# Altium PCB PCB1.PcbDoc
Units mm, origin at the board's own origin, x right, y up, seen from the top; angles counter-clockwise.
Board outline 80 x 80 mm, 2 copper layers (Top Layer, Bottom Layer); 25 components, 8 nets, 53 pads, 24 vias.
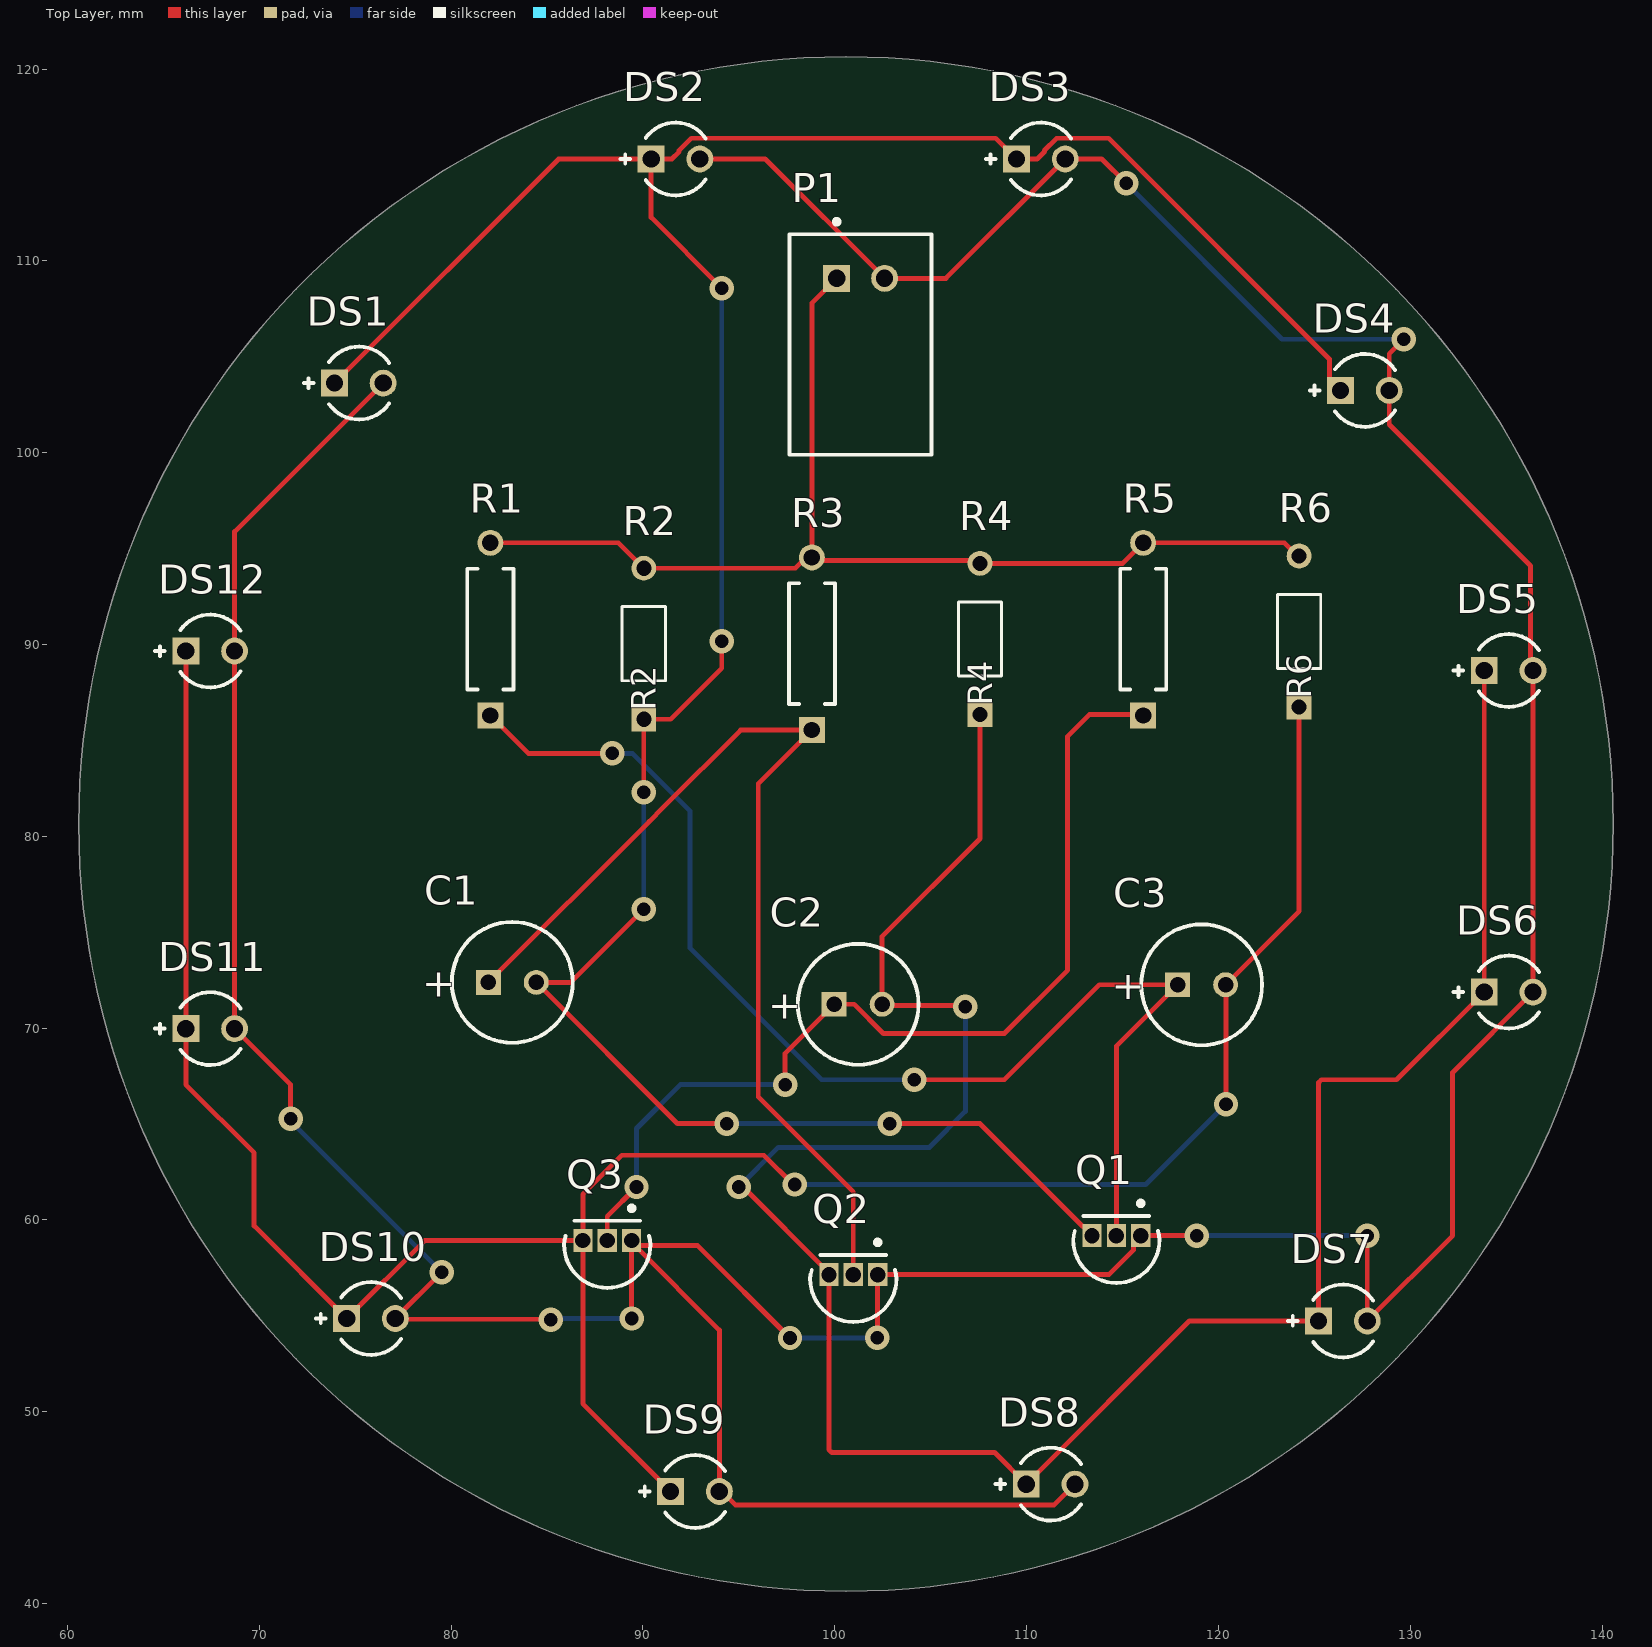
[diagram p0: Top Layer view]
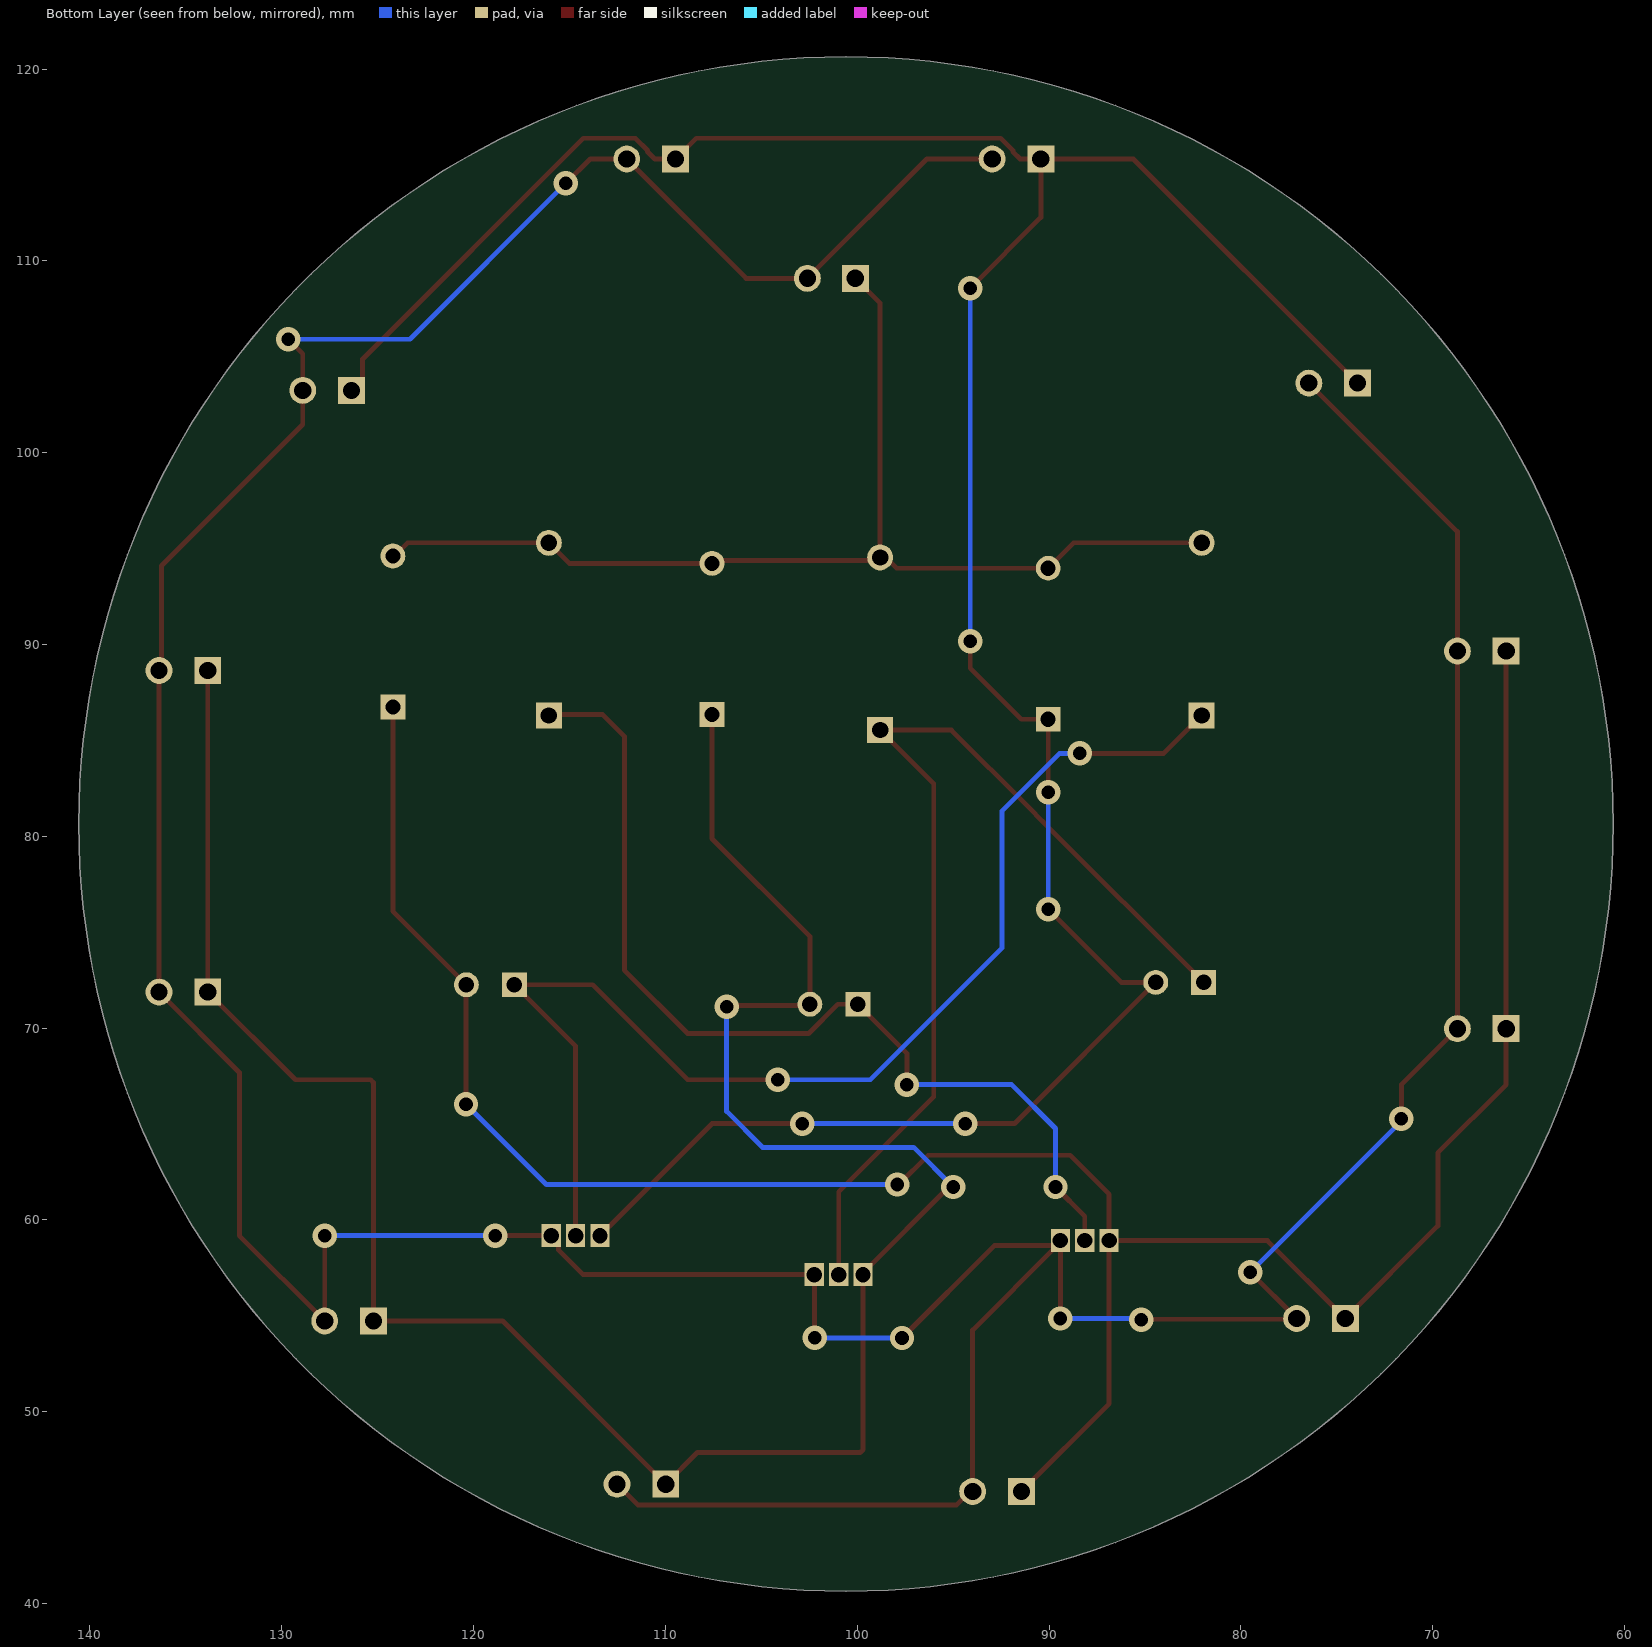
[diagram p1: Bottom Layer view, seen from below]

## Layer stack, top to bottom
Top Solder: solder mask 0.0102, Solder Resist, Dk 3.5
Top Layer: signal copper 0.0356
Dielectric 1: dielectric 0.32, FR-4, Dk 4.8
Bottom Layer: signal copper 0.0356
Bottom Solder: solder mask 0.0102, Solder Resist, Dk 3.5

## Board outline
60.584,80.645 ccw(c100.584,80.645) 100.584,40.645 ccw(c100.584,80.645) 140.584,80.645 ccw(c100.584,80.645) 100.584,120.645 ccw(c100.584,80.645)

## Design rules (kind name [scope] priority, off if disabled: settings)
Clearance [All] p1: gap=0.254 ignorepadtopadclearanceinfootprint=FALSE
PolygonConnect [All] p1: connectstyle=Relief reliefconductorwidth=0.254 reliefentries=4 polygonreliefangle="90 Angle" airgapwidth=0.254
RoutingVias [All] p1: holewidth=0.711 width=1.27 viastyle="Through Hole" minholewidth=0.711 minwidth=1.27 maxholewidth=0.711 maxwidth=1.27
SolderMaskExpansion [All] p1: expansion=0 istentingtop=FALSE
SupplyNets "Schematic Supply Nets" [InNet('GND')] p1: voltage=0.000
Width [All] p1: maxlimit=0.254 minlimit=0.254 preferedwidth=0.254
30 further rules are at their usual default settings.

## Components (designator, comment, footprint, x,y, rotation, side; value= is the part's Value field where it differs from the comment)
C1 "ECA-2AM220" CAPPR55-250-1120X630X1220 83.185,72.39 r0 top value=22µF
C2 "ECA-2AM220" CAPPR55-250-1120X630X1220 101.219,71.247 r0 top value=22µF
C3 "ECA-2AM220" CAPPR55-250-1120X630X1220 119.126,72.263 r0 top value=22µF
DS1 "LTL-1CHE" INDPR60-254-520X380X650 75.184,103.632 r0 top
DS2 "LTL-1CHE" INDPR60-254-520X380X650 91.694,115.316 r0 top
DS3 "LTL-1CHE" INDPR60-254-520X380X650 110.744,115.316 r0 top
DS4 "LTL-1CHE" INDPR60-254-520X380X650 127.635,103.251 r0 top
DS5 "LTL-1CHE" INDPR60-254-520X380X650 135.128,88.646 r0 top
DS6 "LTL-1CHE" INDPR60-254-520X380X650 135.128,71.882 r0 top
DS7 "LTL-1CHE" INDPR60-254-520X380X650 126.492,54.737 r0 top
DS8 "LTL-1CHE" INDPR60-254-520X380X650 111.252,46.228 r0 top
DS9 "LTL-1CHE" INDPR60-254-520X380X650 92.71,45.847 r0 top
DS10 "LTL-1CHE" INDPR60-254-520X380X650 75.819,54.864 r0 top
DS11 "LTL-1CHE" INDPR60-254-520X380X650 67.437,69.977 r0 top
DS12 "LTL-1CHE" INDPR60-254-520X380X650 67.437,89.662 r0 top
P1 "S2B-XH-A(LF)(SN)" JST-S2B-XH-A(LF)(SN)_V 101.346,109.093 r0 top
Q1 "S9013" JSCJ-TO-92-3_V 114.681,59.182 r180 top
Q2 "S9013" JSCJ-TO-92-3_V 100.965,57.15 r180 top
Q3 "S9013" JSCJ-TO-92-3_V 88.138,58.928 r180 top
R1 "MFR-25FBF52-10K" RESA60-630X240 82.042,90.805 r90 top value=10k
R2 "CF18JT330R" STA_CF18_STP 90.043,86.106 r90 top value=330
R3 "MFR-25FBF52-10K" RESA60-630X240 98.806,90.043 r90 top value=10k
R4 "CF18JT330R" STA_CF18_STP 107.569,86.36 r90 top value=330
R5 "MFR-25FBF52-10K" RESA60-630X240 116.078,90.805 r90 top value=10k
R6 "CF18JT330R" STA_CF18_STP 124.206,86.741 r90 top value=330

## Footprints (in the part's own frame and the unit in brackets; to place one, negate y for a bottom-side part, rotate by r counter-clockwise, add the part's x,y. Pads: shape width x height; smd on the part's side, far side on the other; paste and mask are expansions set on the pad)
CAPPR55-250-1120X630X1220 [mm] "THD, 2-Leads, Dia 6.3mm, Pin Spacing 2.5mm"
  rect 1.3x1.3 hole 0.8: 1(-1.25,0)
  round 1.3 hole 0.8: 2(1.25,0)
  silkscreen extent -3.15,-3.15 3.15,3.15, body extent -3.15,-3.15 3.16,3.15, height 12.21
INDPR60-254-520X380X650 [mm] "THD, 2-Leads, Dia 3.8mm, Pitch 2.54mm"
  rect 1.4x1.4 hole 0.9: 1(-1.27,0)
  round 1.4 hole 0.9: 2(1.27,0)
  silkscreen extent -2.87,-1.9 1.58,1.9, body extent -1.9,-1.9 1.9,1.9, height 6.5
JSCJ-TO-92-3_V [mm] "TO-92, 3-leads, Height 4.7mm, Pitch 1.27mm"
  rect 1x1.2 hole 0.8: 1(-1.27,0) 2(0,0) 3(1.27,0)
  silkscreen extent -2.25,-1.81 2.25,2.47, body extent -2.25,-1.03 2.25,2.47, height 4.7
JST-S2B-XH-A(LF)(SN)_V [mm] "Header, 2-Leads, Body 7.4x11.5mm, Pitch 2.5mm"
  rect 1.4x1.4 hole 0.9: 1(-1.25,0)
  round 1.4 hole 0.9: 2(1.25,0)
  silkscreen extent -3.7,-9.2 3.7,3.08, body extent -3.7,-9.2 3.7,2.3, height 5.95
RESA60-630X240 [mm] "Axial Resistor, 2-Leads, Dia 2.4mm, Body Length 6.3mm"
  rect 1.35x1.35 hole 0.85: 1(-4.5,0)
  round 1.35 hole 0.85: 2(4.5,0)
  silkscreen extent -3.15,-1.2 3.15,1.2, body extent -4.77,-1.19 4.77,1.2, height 2.4
STA_CF18_STP [mil]
  rect 51x51 hole 31 paste-99999 mask+0: 1(0,0)
  round 51 hole 31 paste-99999 mask+0: 2(310,0)
  silkscreen extent 79,-44 231,45, body extent -11,-39 321,39, height 79

## Part data
C1 C2 C3: library part CMP-001-00035-7, "Aluminum Electrolytic Capacitor, 22 uF, +/- 20%, 100 V, -40 to 85 degC, 2-Pin THD, RoHS, Bulk", Capacitor Type=Electrolytic, Case/Package=Radial, Manufacturer=Panasonic, Max Operating Temperature=85°C, Min Operating Temperature=-40°C, Package Description="2-Pin Radial Lead, Dia 6.3 mm, Height 12.2 mm", Package Quantity=200, Package Reference=CAPPR55-250-1120X630X1220, Ripple Current=115mA, Tolerance=20%, Voltage Rating=100V, Datasheet URL=https://industrial.panasonic.com/cdbs/www-data/pdf/RDF0000/ABA0000C1047.pdf, Datasheet Version=Mar-16, Diameter=6.3mm, Lead Pitch=2.5mm, Manufacturer URL=http://www.panasonic.com/, Mounting Technology=TH, Packaging=Bulk, Pins=2, Ripple Current (AC)=115mA, RoHS Compliant=True
DS1 DS2 DS3 DS4 DS5 DS6 DS7 DS8 DS9 DS10 DS11 DS12: library part CMP-007-00018-2, "LED Uni-Color Red, 100 mW, 30 mA, -55 to 100 degC, 2-Pin THD, RoHS, Bulk", Case/Package=Radial, Colour=Red, Forward Current=20mA, Forward Voltage=2V, Manufacturer=Lite-On, Max Operating Temperature=100°C, Min Operating Temperature=-55°C, Package Description="2-Pin Through Hole Device, Dia 3.8 mm, Pitch 2.54 mm", Package Quantity=1000, Datasheet URL=https://datasheet.ciiva.com/15117/getdatasheetpartid-187746-15117985.pdf, Datasheet Version=Dec-03, Illumination Colour=Red, Lens Style=Dome, Luminous Intensity=12.6mcd, Manufacturer URL=http://www.us.liteon.com/, Mounting Technology=TH, Nominal Vf=2V, Package Reference=LTL-1CHE, Packaging=Bulk, Pins=2, RoHS Compliant=True, Viewing Angle=60degrees
P1: library part CMP-002-00032-2, "Male Header, Pitch 2.5 mm, 1 x 2 Position, Height 6.1 mm, Tail Length 3.4 mm, -25 to 85 degC, RoHS, Bulk", Manufacturer=JST, Max Operating Temperature=85°C, Min Operating Temperature=-25°C, Package Description="XH Series Disconnectable Crimp Style Connector, Pitch 2.5 mm, 1 x 2 Position, Height 6.1 mm, Tail Length 3.4 mm", Case/Package=S2B-XH-A(LF)(SN), Connector Type=Header, Datasheet URL=http://www.jst-mfg.com/product/pdf/eng/eXH.pdf, Datasheet Version=May-16, Gender=Male, Manufacturer URL=http://www.jst.com/home2.html, Mounting Technology=TH, Package Reference=S2B-XH-A(LF)(SN), RoHS Compliant=Unknown
Q1 Q2 Q3: library part CMP-013-00000-3, "Transistor, NPN, 0.1 uA, 150 MHz, 3-Pin TO-92", Case/Package=TO-92-3, Manufacturer="Jiangsu Changjiang Electronics Technology", Package Description="3-Pin Through Hole Device, Height 4.7 mm, Pitch 2.3 mm", Datasheet URL=http://www.cj-elec.com/txUpfile/20121910315050632.pdf, Datasheet Version="Rev. B, 11/2011", Mounting Technology=TH, Package Reference=TO-92-3, RoHS Compliant=False
R1 R3 R5: library part CMP-009-00047-4, "Axial Resistor, 10 KOhm, +/- 1%, 0.25 W, -55 to 155 degC, 2-Pin THD, RoHS, Bulk", Case/Package=Axial, Manufacturer=Yageo, Max Operating Temperature=155°C, Min Operating Temperature=-55°C, Package Description="2-Pin Axial Lead, Dia 2.4 mm, Body Length 6.3 mm", Package Quantity=200, Package Reference=MFR-25, Power=250mW, Tolerance=1%, Voltage Rating=250V, Datasheet URL=http://www.yageo.com/documents/recent/Yageo%20LR_MFR_2013.pdf, Datasheet Version=Apr-13, Manufacturer URL=http://www.yageo.com/, Mounting Technology=TH, Packaging=Bulk, RoHS Compliant=True
R2 R4 R6: library part CMP-009-00177-2, "Fixed Resistor, Carbon Film, 0.125W, 330ohm, 250V, 5% +/-Tol, -400, 0ppm/Cel, Through Hole Mount", Case/Package=Conformal, Max Operating Temperature=155°C, Min Operating Temperature=-55°C, Tolerance=5%, Mounting Technology="Axial, Through Hole"

## Via types
v1: diameter 1.27, hole 0.711, Top Layer to Bottom Layer, 24 vias

## Nets (pads, with @x,y where several pads share a name; then routed paths per layer and width w, separated by ;. In a path a pad name is that pad's centre, name@x,y a point inside that pad or via, vN(x,y) a via of type N, cw(c..) or ccw(c..) an arc to the next point about the centre after c; other vN are vias at no path point)
GND: DS1.2 DS2.2 DS3.2 DS4.2 DS5.2 DS6.2 DS7.2 DS8.2 DS9.2 DS10.2 DS11.2 DS12.2 P1.2 Q1.1 Q2.1 Q3.1 | length 260.6
  Top Layer w0.254: v1(71.628,65.278) 71.628,67.056 DS11.2 DS12.2 68.707,95.885 DS1.2 ; v1(79.502,57.277) DS10.2 77.125,54.828 85.149,54.828 v1(85.185,54.793) ; v1(89.408,54.864) Q3.1 ; Q3.1@89.612,58.624 93.98,54.256 DS9.2 94.109,45.847 94.809,45.147 111.441,45.147 DS8.2 ; Q3.1@89.662,58.674 92.837,58.674 v1(97.663,53.848) ; DS2.2 96.373,115.316 P1.2 105.791,109.093 DS3.2 113.919,115.316 v1(115.189,114.046) ; v1(102.216,53.852) 102.235,53.871 Q2.1 114.288,57.15 115.578,58.44 115.578,58.809 Q1.1 v1(118.872,59.182) ; v1(127.762,59.182) DS7.2 132.207,59.182 132.207,67.691 DS6.2 DS5.2 136.271,88.773 136.271,94.107 128.905,101.473 DS4.2 128.905,105.156 v1(129.667,105.918)
  Bottom Layer w0.254: v1(71.628,65.278) 71.628,65.151 v1(79.502,57.277) ; v1(85.185,54.793) 85.256,54.864 v1(89.408,54.864) ; v1(97.663,53.848) 97.665,53.85 102.214,53.85 v1(102.216,53.852) ; v1(115.189,114.046) 123.317,105.918 v1(129.667,105.918) ; v1(118.872,59.182) v1(127.762,59.182)
NetC1_1: C1.1 Q2.2 R3.1 | length 53.9
  Top Layer w0.254: C1.1 90.317,80.772 91.059,81.514 95.088,85.543 R3.1 96.012,82.749 96.012,66.421 100.965,61.468 Q2.2
NetC1_2: C1.2 DS1.1 DS2.1 DS3.1 DS4.1 Q1.3 R2.1 | length 149.6
  Top Layer w0.254: DS1.1 85.598,115.316 DS2.1 ; v1(90.043,76.2) 86.233,72.39 C1.2 91.801,65.024 v1(94.361,65.024) ; v1(90.043,82.296) R2.1 91.44,86.106 94.107,88.773 v1(94.107,90.17) ; v1(94.107,108.585) 90.424,112.268 DS2.1 ; v1(102.87,65.024) 107.569,65.024 112.938,59.655 113.038,59.655 113.411,59.282 Q1.3 ; DS4.1 125.792,103.824 125.792,104.88 114.275,116.397 111.566,116.397 110.933,115.764 110.933,115.694 110.555,115.316 DS3.1 108.393,116.397 92.516,116.397 91.883,115.764 91.883,115.694 91.505,115.316 DS2.1
  Bottom Layer w0.254: v1(90.043,76.2) v1(90.043,82.296) ; v1(94.107,90.17) v1(94.107,108.585) ; v1(94.361,65.024) v1(102.87,65.024)
NetC2_1: C2.1 Q3.2 R5.1 | length 51.2
  Top Layer w0.254: Q3.2 88.138,60.198 v1(89.662,61.722) ; v1(97.409,67.056) 97.409,68.687 C2.1 101.011,71.247 102.535,69.723 108.839,69.723 112.141,73.025 112.141,85.217 113.284,86.36 116.023,86.36 R5.1
  Bottom Layer w0.254: v1(89.662,61.722) 89.662,64.77 91.948,67.056 v1(97.409,67.056)
NetC2_2: C2.2 DS5.1 DS6.1 DS7.1 DS8.1 Q2.3 R4.1 | length 125.9
  Top Layer w0.254: v1(94.996,61.722) 95.223,61.722 99.695,57.25 Q2.3 99.695,48.028 99.844,47.879 108.331,47.879 DS8.1 118.491,54.737 DS7.1 125.222,67.161 125.371,67.31 129.286,67.31 DS6.1 DS5.1 ; v1(106.807,71.12) 106.743,71.183 102.533,71.183 C2.2 102.469,74.783 107.569,79.883 R4.1
  Bottom Layer w0.254: v1(94.996,61.722) 97.062,63.788 104.936,63.788 106.807,65.659 v1(106.807,71.12)
NetC3_1: C3.1 Q1.2 R1.1 | length 64.3
  Top Layer w0.254: R1.1 84.019,84.328 v1(88.392,84.328) ; v1(104.14,67.31) 108.839,67.31 113.792,72.263 C3.1 114.681,69.068 Q1.2
  Bottom Layer w0.254: v1(88.392,84.328) 89.448,84.328 92.456,81.32 92.456,74.168 99.314,67.31 v1(104.14,67.31)
NetC3_2: C3.2 DS9.1 DS10.1 DS11.1 DS12.1 Q3.3 R6.1 | length 128.7
  Top Layer w0.254: DS12.1 DS11.1 66.167,67.056 69.723,63.5 69.723,59.69 DS10.1 78.613,58.928 Q3.3 ; DS9.1 86.868,50.419 Q3.3 ; v1(97.917,61.849) 97.825,61.849 96.301,63.373 88.9,63.373 86.868,61.341 Q3.3 ; v1(120.396,66.04) 120.386,66.05 120.386,72.253 C3.2 124.206,76.093 R6.1
  Bottom Layer w0.254: v1(97.917,61.849) 116.205,61.849 v1(120.396,66.04)
NetP1_1: P1.1 R1.2 R2.2 R3.2 R4.2 R5.2 R6.2 | length 58.9
  Top Layer w0.254: R1.2 88.718,95.305 R2.2 97.946,93.98 98.509,94.543 R3.2 ; P1.1 98.806,107.803 R3.2 ; R6.2 124.131,94.615 123.441,95.305 R5.2 115.007,94.234 R4.2 107.414,94.389 98.961,94.389 R3.2

## Silkscreen, mask and mechanical layers (free items; w line width, h text height)
Mechanical 1:
  circle w0.254: c100.584,80.645 r40

## Text inside footprints (layer, text, board x,y; h text height)
C1: Top Overlay "+" at 78.485,71.64 h1.5
C2: Top Overlay "+" at 96.519,70.497 h1.5
C3: Top Overlay "+" at 114.426,71.513 h1.5